# Altium PCB PCB1.PcbDoc
Units mil, origin at the board's own origin, x right, y up, seen from the top; angles counter-clockwise.
Board outline 1316.33 x 860.03 mil, 2 copper layers (Top Layer, Bottom Layer); 10 components, 10 nets, 25 pads, 2 vias.
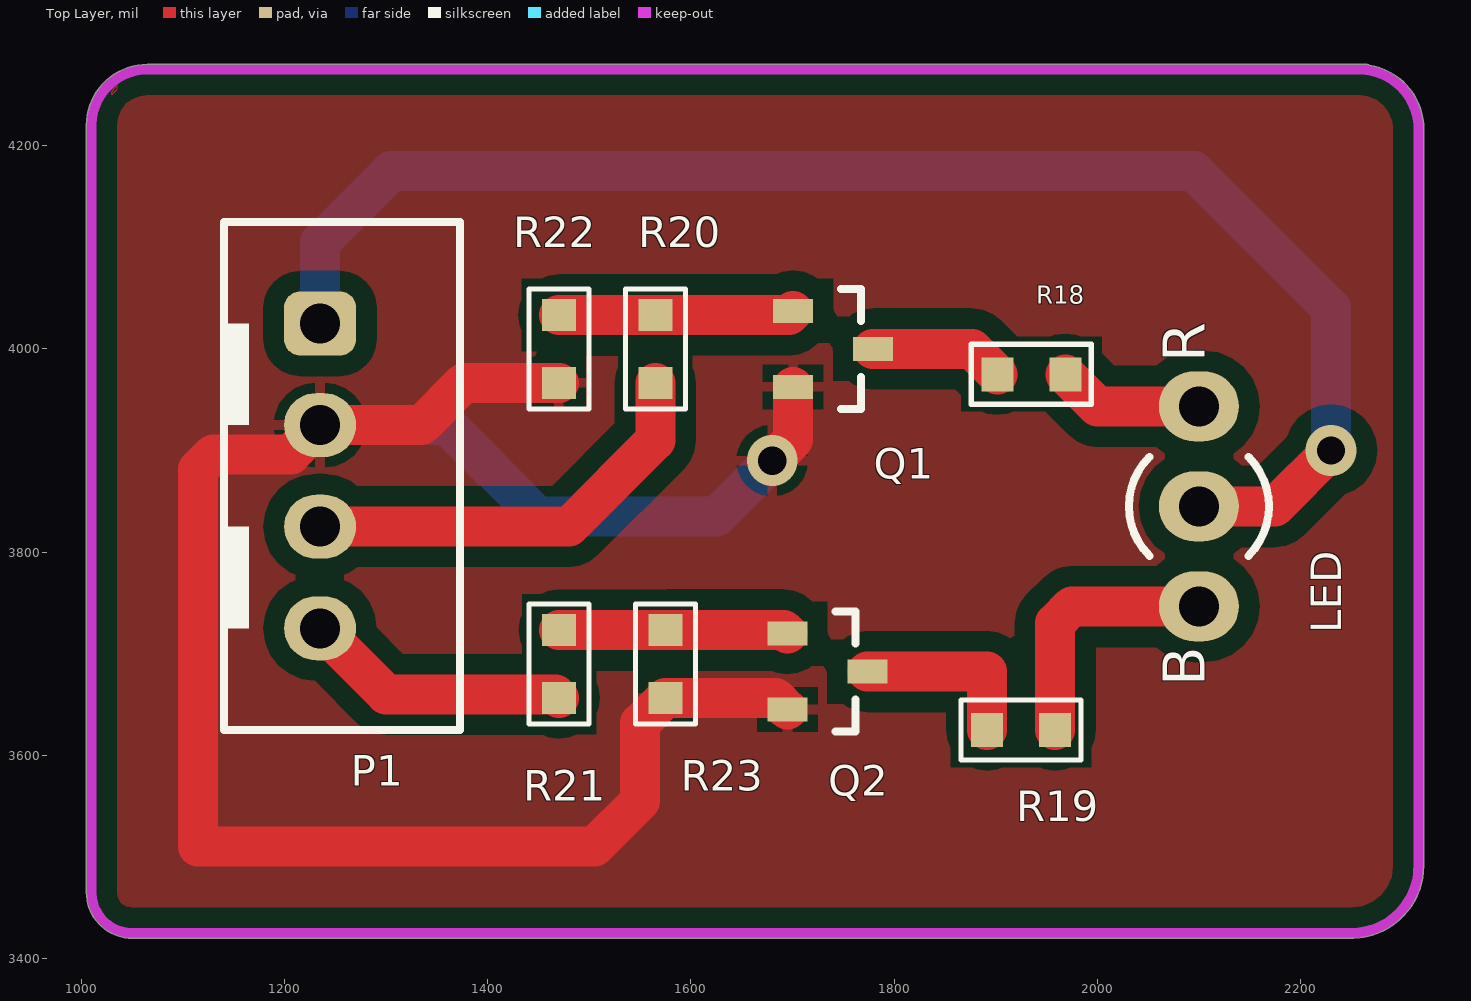
[diagram p0: Top Layer view]
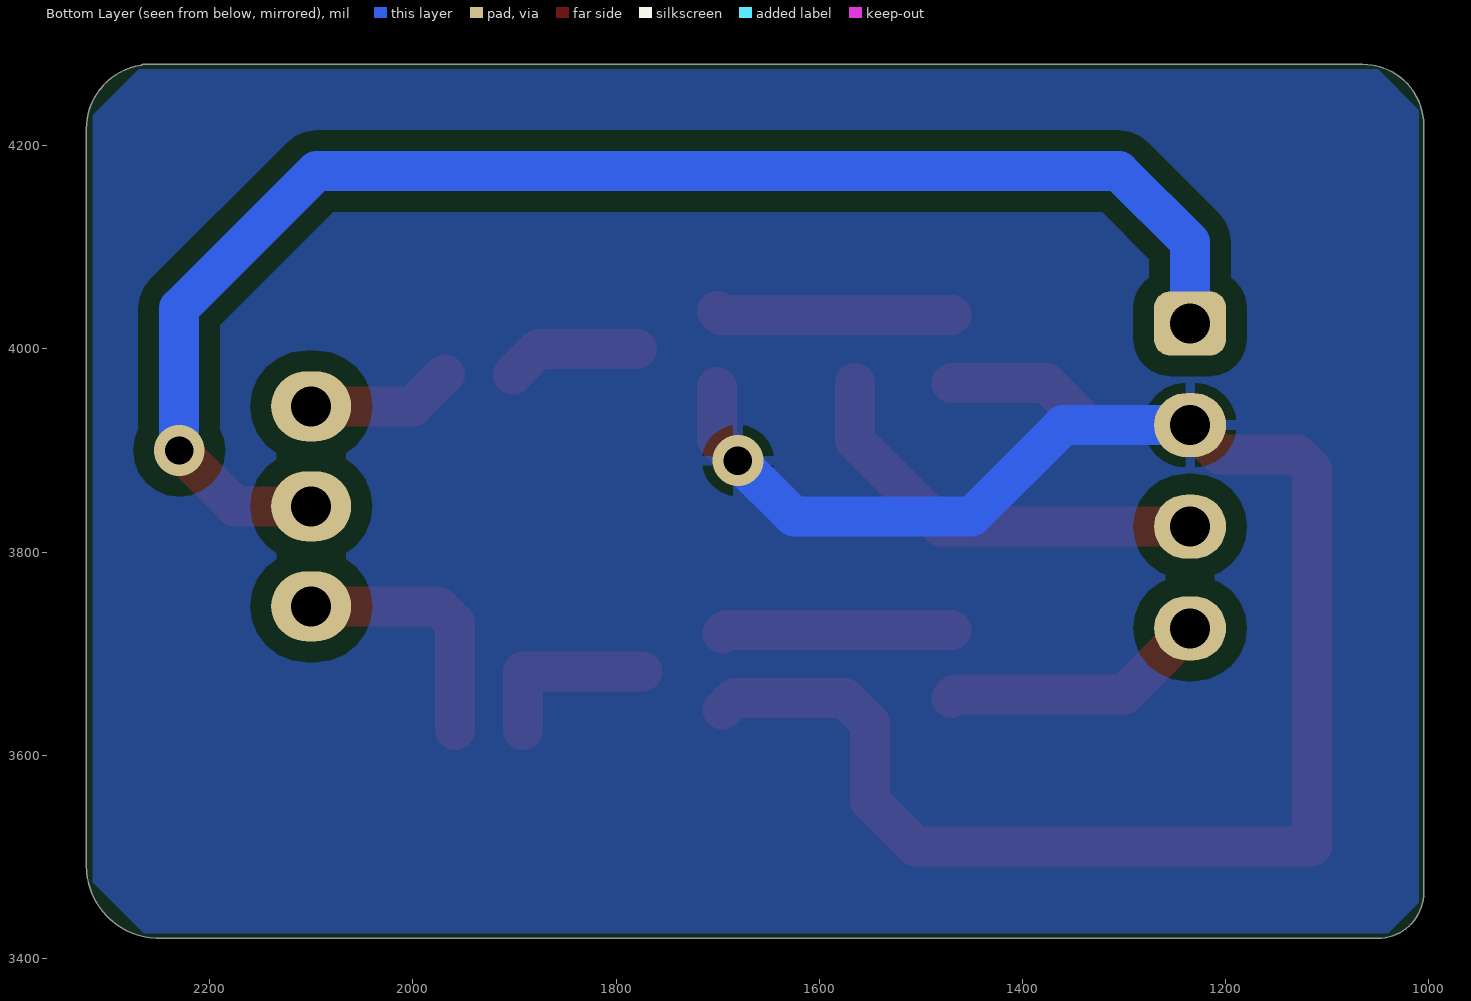
[diagram p1: Bottom Layer view, seen from below]
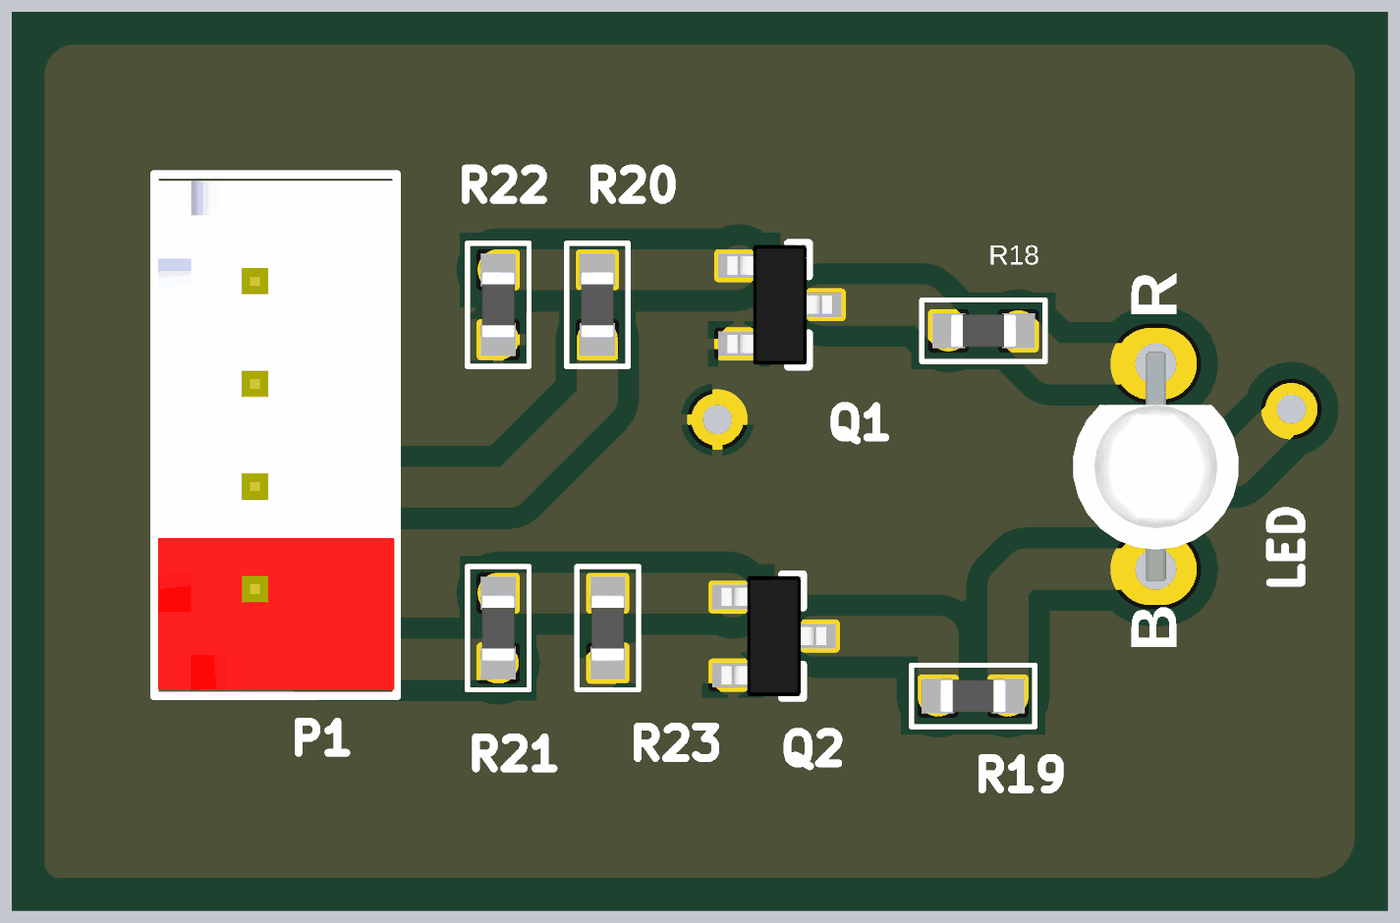
[diagram p2: 3D render of the assembled board from above, using the file's embedded part models]

## Layer stack, top to bottom
Top Solder: solder mask 0.4, Solder Resist, Dk 3.5
Top Layer: signal copper 1.4
Dielectric 1: dielectric 12.6, FR-4, Dk 4.8
Bottom Layer: signal copper 1.4
Bottom Solder: solder mask 0.4, Solder Resist, Dk 3.5

## Board outline
1050,3419.99 cw(c1050,3465) 1004.99,3465 1004.99,4220 cw(c1065,4220) 1065,4280.02 2265,4280.02 cw(c2265,4275) 2267.65,4279.26 cw(c2257.5,4216.25) 2321.32,4216.25 cw(c2257.5,4216.25) 2321.26,4213.64 2321.26,3491.25 cw(c2250,3491.25) 2252.3,3420.02 cw(c2252.14,3425.03) 2251.15,3420.12 cw(c2250,3425) 2250,3419.99

## Design rules (kind name [scope] priority, off if disabled: settings)
Clearance [All] p1: gap=20 ignorepadtopadclearanceinfootprint=FALSE
PolygonConnect [All] p1: connectstyle=Relief reliefconductorwidth=10 reliefentries=4 polygonreliefangle="90 Angle" airgapwidth=10
RoutingVias [All] p1: holewidth=28 width=50 viastyle="Through Hole" minholewidth=28 minwidth=50 maxholewidth=28 maxwidth=50
SolderMaskExpansion [All] p1: expansion=4
Width [All] p1: maxlimit=100 minlimit=10 preferedwidth=40
30 further rules are at their usual default settings.

## Components (designator, comment, footprint, x,y, rotation, side; value= is the part's Value field where it differs from the comment)
LED "RB LED" LED-BICOLOR-3MM 2100,3943.43 r0 top
P1 "Header 4" HDR/Header/4/BOX/RED 1235,3875 r270 top
Q1 "MMBT3904LT1G" SOT-23 1740,4000 r0 top
Q2 "MMBT3904LT1G" SOT-23 1734.37,3682.4 r0 top
R18 "330" "R 0603" 1935,3975 r0 top
R19 "330" "R 0603" 1925,3625 r0 top
R20 "4.7k" "R 0603" 1565,4000 r90 top
R21 "4.7k" "R 0603" 1470,3690 r90 top
R22 "47k" "R 0603" 1470,4000 r270 top
R23 "47k" "R 0603" 1575,3690 r270 top

## Footprints (in the part's own frame and the unit in brackets; to place one, negate y for a bottom-side part, rotate by r counter-clockwise, add the part's x,y. Pads: shape width x height; smd on the part's side, far side on the other; paste and mask are expansions set on the pad)
HDR/Header/4/BOX/RED [mm]
  rrect50% 1.6x1.8 hole 1: 1(-3.81,0)
  oval 1.6x1.8 hole 1: 2(-1.27,0) 3(1.27,0) 4(3.81,0)
  silkscreen extent -6.35,-2.41 6.35,3.5, body extent -6.2,-2.3 6.2,3.45, height 7
LED-BICOLOR-3MM [mm] "Diode, Axial; Body 5.2 x 2.7 mm (LxDia. max), Lead Dia. 0.86 mm (max)"
  oval 2x1.75 hole 1: 1(0,0) 2(0,-2.5) 3(0,-5)
  silkscreen extent -1.75,-3.74 1.75,-1.26, body extent -2.02,-5.29 2.02,0.29, height 6.76
"R 0603" [mm] "Chip Resistor, 2-Leads, Body 1.6x0.8mm, IPC Medium Density"
  rect 0.8x0.85 smd: 1(-0.85,0) 2(0.85,0)
  silkscreen extent -1.5,-0.75 1.5,0.75, body extent -0.8,-0.4 0.8,0.4, height 0.5
SOT-23 [mm] "SOT23, 3-Leads, Body 3.0x2.5mm (max), Pitch 0.95mm, IPC Medium Density"
  rect 1x0.6 smd: 1(-1,0.95) 2(-1,-0.95) 3(1,0)
  silkscreen extent 0.2,-1.5 0.7,1.5, body extent -1.28,-1.46 1.27,1.46, height 0.95

## Part data
LED: library part "LED 2-color-A", "Bicolor RB 3mm LED"
P1: "Header, 4-Pin"
Q1 Q2: library part "Transistor NPN", "NPN Bipolar Transistor"
R18 R19 R20 R21 R22 R23: library part Resistor, "Resistor"

## Via types
v1: diameter 50, hole 28, Top Layer to Bottom Layer, 2 vias

## Nets (pads, with @x,y where several pads share a name; then routed paths per layer and width w, separated by ;. In a path a pad name is that pad's centre, name@x,y a point inside that pad or via, vN(x,y) a via of type N, cw(c..) or ccw(c..) an arc to the next point about the centre after c; other vN are vias at no path point)
GND: P1.2 Q1.2 Q2.2 R22.2 R23.2 | length 2038.1
  Top Layer w39.37: R22.2 1376.54,3966.54 1335,3925 P1.2 1206.18,3896.18 1129.86,3896.18 1115,3881.32 1115,3510 1505,3510 1550,3555 1550,3631.54 R23.2 1683.46,3656.54 Q2.2 ; v1(1680,3890) 1700.63,3910.63 Q1.2
  Bottom Layer w39.37: P1.2 1360,3925 1450,3835 1625,3835 v1(1680,3890)
LED0: P1.3 R20.1 | length 421.7
  Top Layer w39.37: P1.3 1480,3825 1565,3910 R20.1
LED1: P1.4 R21.1 | length 263.4
  Top Layer w39.37: P1.4 1300,3660 1466.54,3660 R21.1
NetLED_1: LED.1 R18.2 | length 144.6
  Top Layer w39.37: R18.2 2000.04,3943.43 LED.1
NetLED_3: LED.3 R19.2 | length 253.4
  Top Layer w39.37: R19.2 1958.46,3730.04 1975,3746.57 LED.3
NetQ1_1: Q1.1 R20.2 R22.1 | length 232.3
  Top Layer w39.37: R22.1 R20.2 1696.69,4033.46 Q1.1
NetQ1_3: Q1.3 R18.1 | length 132.5
  Top Layer w39.37: Q1.3 1876.54,4000 R18.1
NetQ2_1: Q2.1 R21.2 R23.1 | length 226.5
  Top Layer w39.37: R21.2 R23.1 1691.34,3723.46 Q2.1
NetQ2_3: Q2.3 R19.1 | length 175.2
  Top Layer w39.37: Q2.3 1891.54,3682.4 R19.1
VCC: LED.2 P1.1 | length 1452.7
  Top Layer w39.37: LED.2 2175,3845 v1(2230,3900)
  Bottom Layer w39.37: P1.1 1235,4105 1305,4175 2095,4175 2230,4040 v1(2230,3900)

## Polygon pours and split planes (outlines as drawn)
GND on Top Layer (solid, remove dead copper, pour order 28): 1011.25,4235 1050,4273.75 1050,4275 2275,4275 2315,4235 2315,3480 2265,3430 2265,3425.03 1034.97,3425.03 1011.25,3448.75 1011.25,4233.75 1010,4235 1045,4270
GND on Top Layer (solid, remove dead copper, pour order 20): 1035,4260 1035,4255 1030,4250 1030,4252.5
GND on Top Layer (solid, remove dead copper, pour order 6): 1011.25,4275
GND on Bottom Layer (solid, remove dead copper, pour order 26): 1050,4275 2270,4275 2315,4230 2315,3475 2265,3425 1040,3425 1010,3455 1010,4235
GND on Bottom Layer (solid, remove dead copper, pour order 24): 1015,4250

## Keep-outs
Top Layer:
  lines w10: 2250,3425 1845,3425 1285,3425 1050,3425 cw(c1050,3465) 1010,3465 1010,4220 cw(c1065,4220) 1065,4275 2265,4275 ; 2252.14,3425.03 ccw(c2250,3491.25) 2316.22,3493.39 ; 2260,4275 cw(c2257.5,4216.25) 2316.25,4213.75 2316.25,3491.25

## Text inside footprints (layer, text, board x,y; h text height)
LED: Top Overlay "B" at 2119.68,3667.83 h70.87 r90; Top Overlay "R" at 2119.68,3986.73 h70.87 r90